# EAGLE board Acc+Comp (EAGLE 7.2.0)
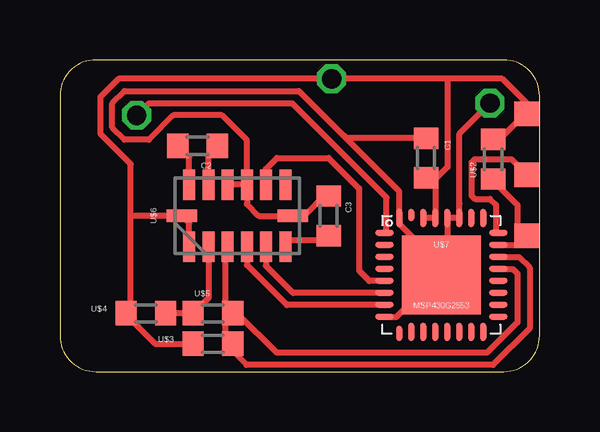
[diagram p0: board, top side]
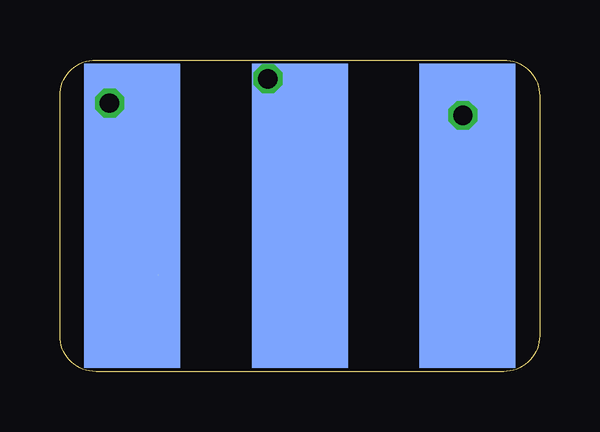
[diagram p1: board, bottom side, seen from below]

Size 20 x 13 mm. Coordinates in mm from the lower left corner, seen from the top.
Copper layers (1*16): Top 0.035mm / dielectric 1.5mm / Bottom 0.035mm
Design rules "Bilex DRU *": minimum track width 10mil, minimum drill 24mil, track to track 10mil, track to pad 10mil, pad to pad 10mil, via to via 10mil, smd to smd 10mil, copper to edge 1mil, drill to drill 8mil, minimum pad ring 10mil, minimum via ring 8mil, stop-mask expansion 4mil, vias tented up to drill 0mil, thermal gap 10mil

## Footprints (pad centres in the part's own frame; a part is rotated, then mirrored left to right if it is on the bottom)
603 = smd 0.889 x 1.016: 1 -0.826,0; 2 0.826,0
CARRIER_SMD2_3POL = smd 4 x 12.7 bottom: GND -6.985,0; RX/TX 6.985,0; VCC 0,0 | smd 1.016 x 1.016: RST -9.461,0.826; TST -9.461,-1.714; VCC'' -9.461,-4.255
LSM303 = smd 1.27 x 0.508: 1 -1.295,2.007; 2 -1.295,1.194; 3 -1.295,0.406; 4 -1.295,-0.406; 5 -1.295,-1.194; 6 -1.295,-2.007; 8 1.295,-2.007; 9 1.295,-1.194; 10 1.295,-0.406; 11 1.295,0.406; 12 1.295,1.194; 13 1.295,2.007 | smd 0.508 x 1.27: 7 0,-2.311; 14 0,2.311
QFN32 = smd 0.762 x 0.254: 1 -2.375,1.75; 2 -2.375,1.25; 3 -2.375,0.75; 4 -2.375,0.25; 5 -2.375,-0.25; 6 -2.375,-0.75; 7 -2.375,-1.25; 8 -2.375,-1.75; 17 2.375,-1.75; 18 2.375,-1.25; 19 2.375,-0.75; 20 2.375,-0.25; 21 2.375,0.25; 22 2.375,0.75; 23 2.375,1.25; 24 2.375,1.75 | smd 0.254 x 0.635: 9 -1.75,-2.438 | smd 0.254 x 0.762: 10 -1.25,-2.375; 11 -0.75,-2.375; 12 -0.25,-2.375; 13 0.25,-2.375; 14 0.75,-2.375; 15 1.25,-2.375; 16 1.75,-2.375; 25 1.75,2.375; 26 1.25,2.375; 27 0.75,2.375; 28 0.25,2.375; 29 -0.25,2.375; 30 -0.75,2.375; 32 -1.75,2.375 | smd 0.254 x 0.508: 31 -1.25,2.5 | smd 3.302 x 3.302: TP 0,0

## Placement (x,y rotation side)
C1  100n  [603]  15.27,8.91 90 top
C2  220n  [603]  5.74,9.42 180 top
C3  4.7µ  [603]  11.2,6.5 270 top
U$1  CARRIER_SMD2SMD2_3POL  [CARRIER_SMD2_3POL]  10,6.5 180 top
U$2  10k  [603]  18.06,8.86 90 top
U$3  4.7k  [603]  6.38,1.16 0 top
U$4  4.7k  [603]  3.58,2.43 0 top
U$5  0  [603]  6.38,2.43 0 top
U$6  LSM303  [LSM303]  7.39,6.5 90 top
U$7  MSP430G2553  [QFN32]  15.9,4.03 0 top

## Library data of the parts
C1-C3 U$1-U$7 = thar

## Nets
GND: C1.2 C3.1 U$1.GND U$6.7 U$6.10 U$6.11 U$7.8 U$7.27 U$7.28 U$7.32 U$7.TP
N$2: U$3.2 U$6.3 U$7.22
N$3: U$1.TST U$7.24
N$4: U$1.RST U$2.1 U$7.23
N$5: U$5.2 U$7.21
N$6: C2.1 U$6.12
N$7: C2.2 U$6.13
N$11: C3.2 U$6.6
N$12: U$1.RX/TX U$7.1
N$13: U$6.5 U$7.6
N$14: U$6.4 U$7.7
N$16: U$6.9 U$7.5
N$17: U$4.2 U$5.1 U$6.2
VCC: C1.1 U$1.VCC U$1.VCC'' U$2.2 U$3.1 U$4.1 U$6.1 U$6.14 U$7.29 U$7.30

## Tracks (layer width: path | path; a pad name or v marks a point on that pad's centre or on a via)
GND  (via drill 0.8)  (1 unrouted)
  Top 0.254: U$7.28 U$7.27 16.65,6.99 16.66,7.01 16.66,9.93 v17.93,11.2 | 16.43,4.35 16.19,5.38 16.16,5.35 | 16.43,4.35 16.48,3.06 U$7.TP 15.01,2.94 14.89,3.14 14.03,2.28 13.59,2.28 | U$7.8 13.59,2.28 | U$7.28 16.15,4.72 | 16.15,4.72 16.15,4.42 16.43,4.35 | 16.15,4.72 15.52,5.35 14.76,5.55 14.15,6.16 14.15,6.34 U$7.32 14.15,7.51 11.6,10.07 | 11.6,10.07 11.93,9.74 C1.2 | 11.6,10.07 11.98,9.7 | U$6.10 U$6.11 | U$6.10 7.8,6.98 8.28,6.5 U$6.7 10.19,6.5 11.08,7.39 11.08,7.51 11.2,7.39 C3.1 | U$6.10 7.8,9.65 6.76,10.69 4.73,10.69 3.71,9.67 2.7,9.67 2.19,10.18 2.19,11.2 2.7,11.7 9.96,11.7 11.6,10.07 | U$7.28 | U$7.8 13.59,2.28
  Bottom 0.254: 18,6.5 18,11.13 v17.93,11.2 16.98,10.25 U$1.GND
N$2
  Top 0.254: U$6.3 6.89,5.2 6.89,1.16 | 6.89,1.16 7.78,0.27 18.06,0.27 19.59,1.8 19.59,4.34 19.14,4.78 U$7.22 | U$3.2 6.89,1.16
N$3
  Top 0.254: 19.61,7.88 19.46,8.02 19.5,8.18 U$1.TST | U$7.24 18.19,5.78 | U$1.TST 18.82,8.86 17.3,8.86 17.17,8.73 17.17,7.33 17.3,7.21 17.93,7.21 18.19,6.95 18.19,5.81 18.19,5.78 | U$1.TST | U$7.24 18.19,5.78
N$4
  Top 0.254: 19.46,5.48 19.5,5.38 19.46,5.42 U$1.RST | 19.46,5.48 19.5,5.69 19.08,5.74 19.08,6.95 18.06,7.97 U$2.1 | U$7.23 18.34,5.28 | 18.34,5.28 19.28,5.28 19.46,5.48 | U$7.23 18.34,5.28
N$5
  Top 0.254: U$5.2 7.39,2.43 9.04,0.78 17.81,0.78 19.08,2.05 19.08,4.08 18.88,4.28 U$7.21
N$6
  Top 0.254: U$6.12 6.2,9.05 C2.1
N$7
  Top 0.254: U$6.13 5.39,8.95 C2.2
N$11
  Top 0.254: U$6.6 9.4,5.46 9.43,5.48 11.01,5.48 C3.2
N$12  (via drill 0.8)
  Top 0.254: v3.2,10.69 3.71,11.2 9.68,11.2 13.62,7.26 13.62,5.78 U$7.1
  Bottom 0.254: v3.2,10.69 3.6,8.21 | 3.6,8.21 3.46,7.71 | U$1.RX/TX 3.01,7.63 3.6,8.21
N$13
  Top 0.254: U$6.5 8.59,4.41 9.72,3.28 U$7.6
N$14
  Top 0.254: U$6.4 7.8,4.44 9.46,2.78 U$7.7
N$16
  Top 0.254: U$6.9 8.59,8.45 9.04,8.91 11.2,8.91 12.47,7.64 12.47,4.21 12.9,3.78 U$7.5
N$17
  Top 0.254: U$6.2 6.2,3.08 U$5.1 U$4.2
VCC  (via drill 0.8)
  Top 0.254: U$7.29 | 16.16,12.21 16.16,8.53 15.65,8.02 | 15.65,8.02 U$7.29 | 15.39,8.02 15.33,8.28 | 15.33,8.28 15.65,8.02 | U$7.29 U$7.30 | C1.1 15.33,8.28 | 19.5,10.52 19.46,10.56 | U$2.2 18.12,9.48 19.2,10.56 19.2,10.51 19.46,10.56 | 19.46,10.56 19.65,10.75 19.65,11.01 18.44,12.21 16.16,12.21 | 19.46,10.56 U$1.VCC'' | 16.16,12.21 v11.33,12.21 2.44,12.21 1.68,11.45 1.68,9.93 2.95,8.66 2.95,6.5 | 2.95,2.18 2.95,6.5 | U$6.1 5.39,6.19 U$6.14 2.95,6.5 | 2.95,2.18 3.96,1.16 U$3.1 | U$4.1 2.82,2.43 2.95,2.18
  Bottom 0.254: U$1.VCC 10,10.37 11.84,12.21 v11.33,12.21